# EAGLE board Wifi (EAGLE 7.2.0)

Size 125.36 x 80 mm. Coordinates in mm from the lower left corner, seen from the top.
Outline: 25.36,0 125.36,0 125.36,80 25.36,80 25.36,0
Copper layers (1*16): Top 0.035mm / dielectric 1.5mm / Bottom 0.035mm
Design rules "default": minimum track width 10mil, minimum drill 24mil, track to track 8mil, track to pad 8mil, pad to pad 8mil, via to via 8mil, smd to smd 8mil, copper to edge 40mil, drill to drill 8mil, minimum pad ring 10mil, minimum via ring 8mil, stop-mask expansion 4mil, vias tented up to drill 0mil, thermal gap 10mil

## Footprints (pad centres in the part's own frame; a part is rotated, then mirrored left to right if it is on the bottom)
0402-CAP = smd 0.7 x 0.9: 1 -0.65,0; 2 0.65,0
1X08-BIG = drill 1.016 pad 1.778 octagon: 1 -8.89,0; 2 -6.35,0; 3 -3.81,0; 4 -1.27,0; 5 1.27,0; 6 3.81,0; 7 6.35,0; 8 8.89,0
NX3225 = smd 1.4 x 1.2: 1 -1.1,-0.8; 2 1.1,-0.8; 3 1.1,0.8; 4 -1.1,0.8
M0805 = smd 1.3 x 1.6: 1 -0.95,0; 2 0.95,0
QFN32 = smd 0.4 x 0.25: CHIP_EN/7 -2.3,-1.25; DVDD/24 2.3,1.75; LNA/2 -2.3,1.25; SD_CLK/21 2.3,0.25; SD_CMD/20 2.3,-0.25; SD_DATA_0/22 2.3,0.75; SD_DATA_1/23 2.3,1.25; SD_DATA_2/18 2.3,-1.25; SD_DATA_3/19 2.3,-0.75; TOUT/6 -2.3,-0.75; VDD3P3/3 -2.3,0.75; VDD3P3/4 -2.3,0.25; VDD_RTC/5 -2.3,-0.25; VDDA/1 -2.3,1.75; VDDPST/17 2.3,-1.75; XPD_DCDC/8 -2.3,-1.75 | smd 0.25 x 0.4: EXT_RSTB/32 -1.75,2.3; GPIO0/15 1.25,-2.3; GPIO2/14 0.75,-2.3; MTCK/12 -0.25,-2.3; MTDI/10 -1.25,-2.3; MTDO/13 0.25,-2.3; MTMS/9 -1.75,-2.3; RES12K/31 -1.25,2.3; U0RXD/25 1.75,2.3; U0TXD/26 1.25,2.3; VDD/16 1.75,-2.3; VDDA/30 -0.75,2.3; VDDD/29 -0.25,2.3; VDDPST/11 -0.75,-2.3; XTAL_IN/28 0.25,2.3; XTAL_OUT/27 0.75,2.3 | smd 3.7 x 3.7: GND 0,0
SOP8 = smd 0.6 x 0.4: 1 -2.2,1.8; 2 -2.2,0.6; 3 -2.2,-0.6; 4 -2.2,-1.8; 5 2.2,-1.8; 6 2.2,-0.6; 7 2.2,0.6; 8 2.2,1.8

## Placement (x,y rotation side)
C1  5.6 pF  [0402-CAP]  -7.66,-1.27 0 top  (outside the outline)
C10  15 pF  [0402-CAP]  -3.85,19.05 0 top  (outside the outline)
C18  1 uF  [0402-CAP]  10.12,24.13 0 top
C24  15 pF  [0402-CAP]  6.31,24.13 0 top
C25  100 nF  [0402-CAP]  2.5,24.13 0 top
C26  100 nF  [0402-CAP]  -1.31,24.13 0 top
C28  10 uF  [0402-CAP]  -5.12,24.13 0 top  (outside the outline)
C29  100 nF  [0402-CAP]  10.12,26.67 0 top
JP1  [1X08-BIG]  1.23,8.89 0 top
Q1  [NX3225]  -0.04,19.05 0 top
R6  [M0805]  5.04,19.05 0 top
R15  [M0805]  10.12,13.97 0 top
R19  [M0805]  5.04,13.97 0 top
R21  [M0805]  -0.04,13.97 0 top
R22  12k  [M0805]  10.12,19.05 0 top
U$1  ESP8266EX  [QFN32]  8.85,3.81 0 top
U$2  25Q40  [SOP8]  2.5,2.54 0 top

## Library data of the parts
C1 C10 C18 C24-C26 C28 C29 = SparkFun-Capacitors
JP1 Q1 = adafruit
R6 R15 R19 R21 R22 = resistor
U$1 U$2 = wifi

## Nets
CHIP_EN: JP1.6 R21.2 U$1.CHIP_EN/7
CLK: U$1.SD_CLK/21 U$2.6
CS: U$1.SD_CMD/20 U$2.1
G1: Q1.4
G2: Q1.2
GND: C10.1 C18.1 C24.1 JP1.1 R15.2 R22.2 U$1.GND U$2.4
N$2: R22.1 U$1.RES12K/31
N$3: C24.2 Q1.3 U$1.XTAL_IN/28
N$4: C25.2 C26.2 C28.2 C29.2
N$5: C10.2 Q1.1 U$1.XTAL_OUT/27
N$14: U$1.DVDD/24
N$21: R6.2 U$1.VDDPST/11 U$1.VDDPST/17
N$22: U$1.VDD/16
N$23: R19.2 U$1.GPIO0/15
N$24: R6.1 U$1.GPIO2/14
N$25: R15.1 U$1.MTDO/13
N$26: U$1.MTCK/12
N$28: U$1.MTDI/10
N$29: U$1.MTMS/9
N$30: U$1.XPD_DCDC/8
N$36: C1.1 U$1.LNA/2
RST: JP1.5 U$1.EXT_RSTB/32
RTC: JP1.8 U$1.VDD_RTC/5
RXD: JP1.3 U$1.U0RXD/25
SD0: U$1.SD_DATA_0/22 U$2.2
SD1: U$1.SD_DATA_1/23 U$2.5
SD2: U$1.SD_DATA_2/18 U$2.7
SD3: U$1.SD_DATA_3/19 U$2.3
TOUT: JP1.7 U$1.TOUT/6
TXD: JP1.4 U$1.U0TXD/26
VCC: C18.2 C25.1 C26.1 C28.1 C29.1 JP1.2 R19.1 R21.1 U$1.VDD3P3/3 U$1.VDD3P3/4 U$1.VDDA/1 U$1.VDDA/30 U$1.VDDD/29 U$2.8

## Tracks (layer width: path | path; a pad name or v marks a point on that pad's centre or on a via)
CHIP_EN  (2 unrouted)
CLK  (1 unrouted)
CS  (1 unrouted)
GND  (7 unrouted)
N$2  (1 unrouted)
N$3  (2 unrouted)
N$4  (3 unrouted)
N$5  (2 unrouted)
N$21  (2 unrouted)
N$23  (1 unrouted)
N$24  (1 unrouted)
N$25  (1 unrouted)
N$36  (1 unrouted)
RST  (1 unrouted)
RTC  (1 unrouted)
RXD  (1 unrouted)
SD0  (1 unrouted)
SD1  (1 unrouted)
SD2  (1 unrouted)
SD3  (1 unrouted)
TOUT  (1 unrouted)
TXD  (1 unrouted)
VCC  (13 unrouted)